# EAGLE board keeboartouch (EAGLE 9.6.2)
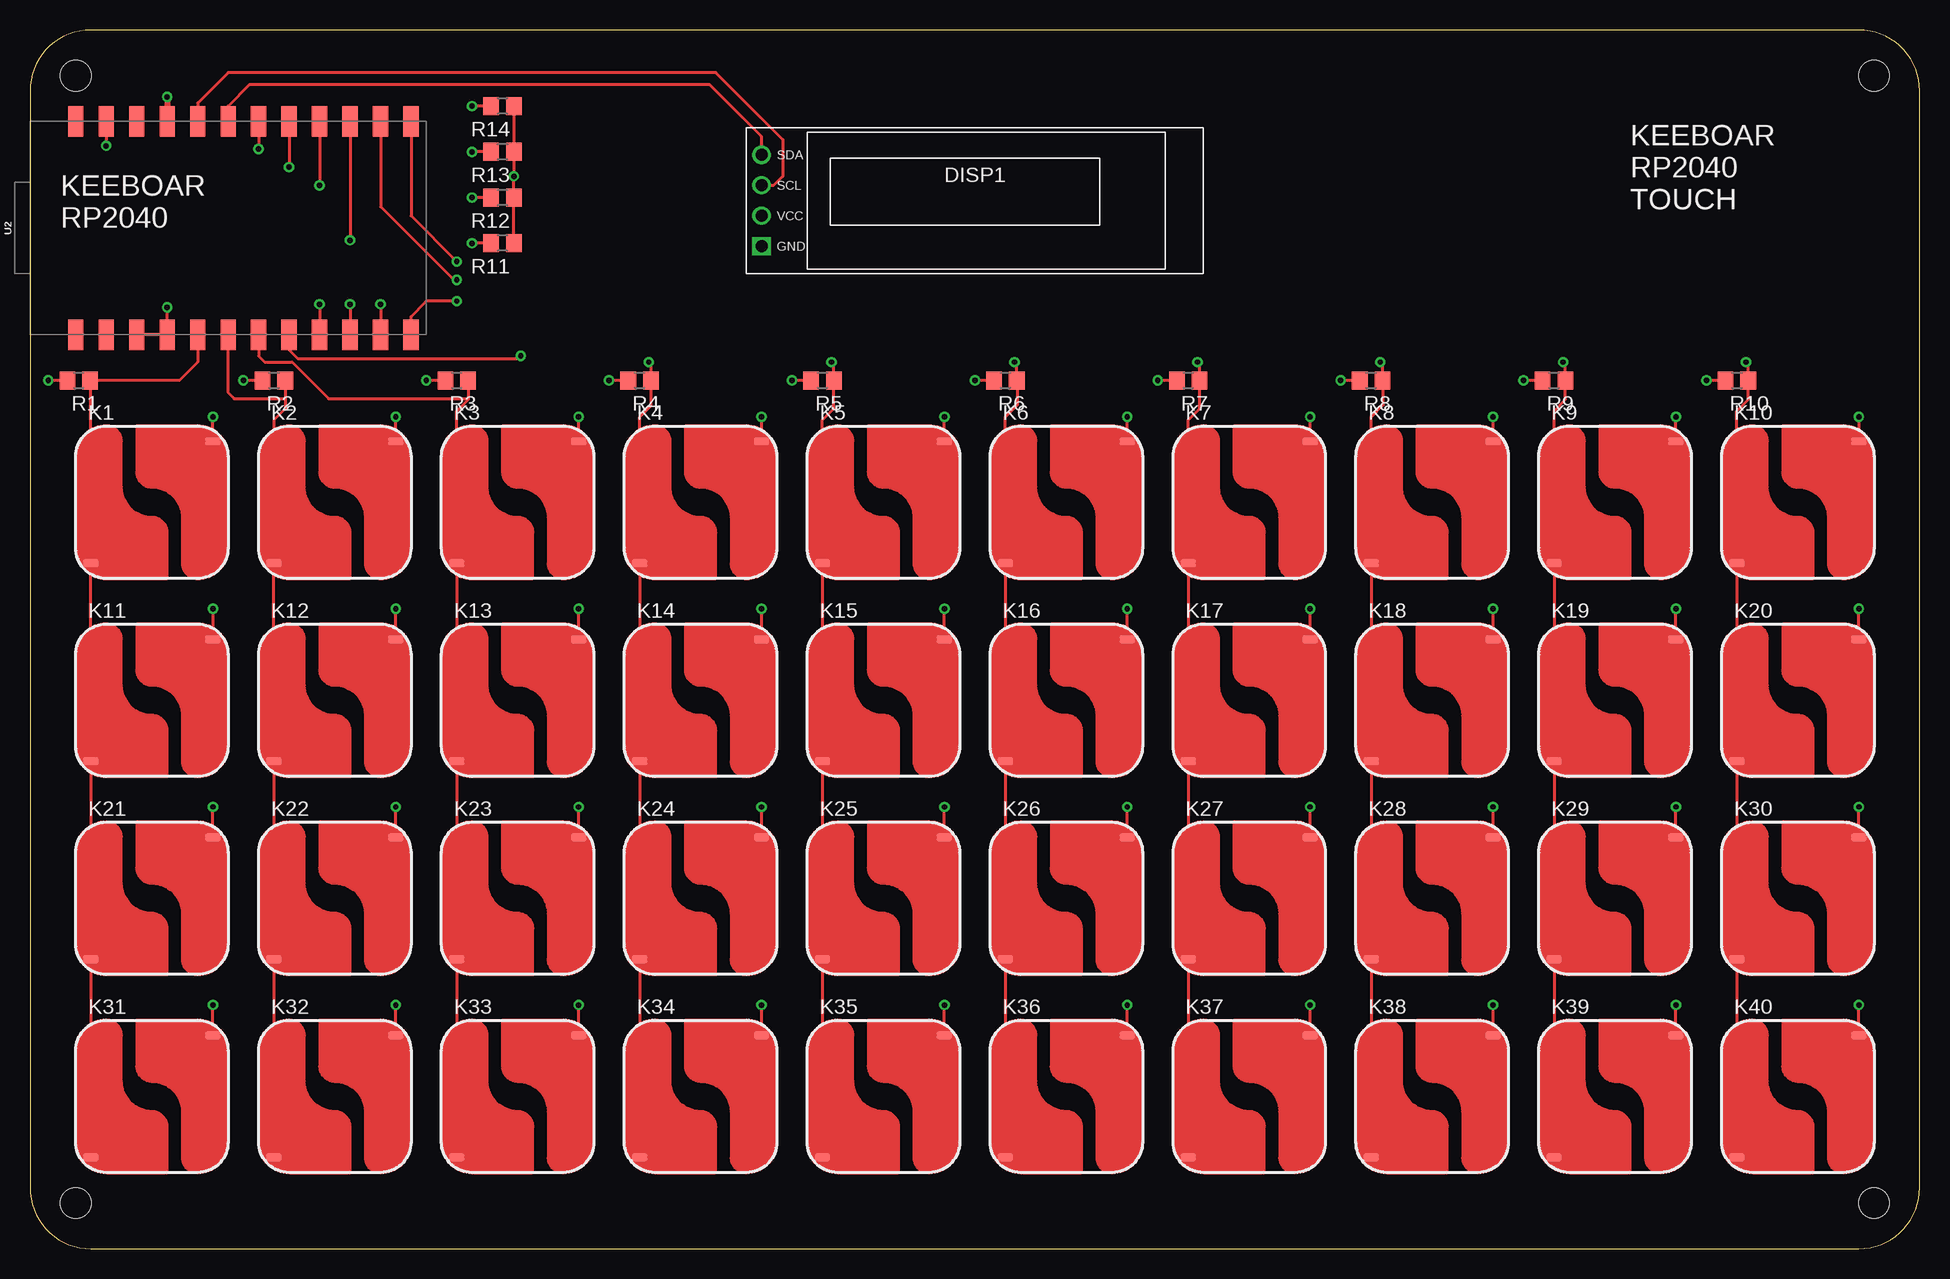
[diagram p0: board, top side]
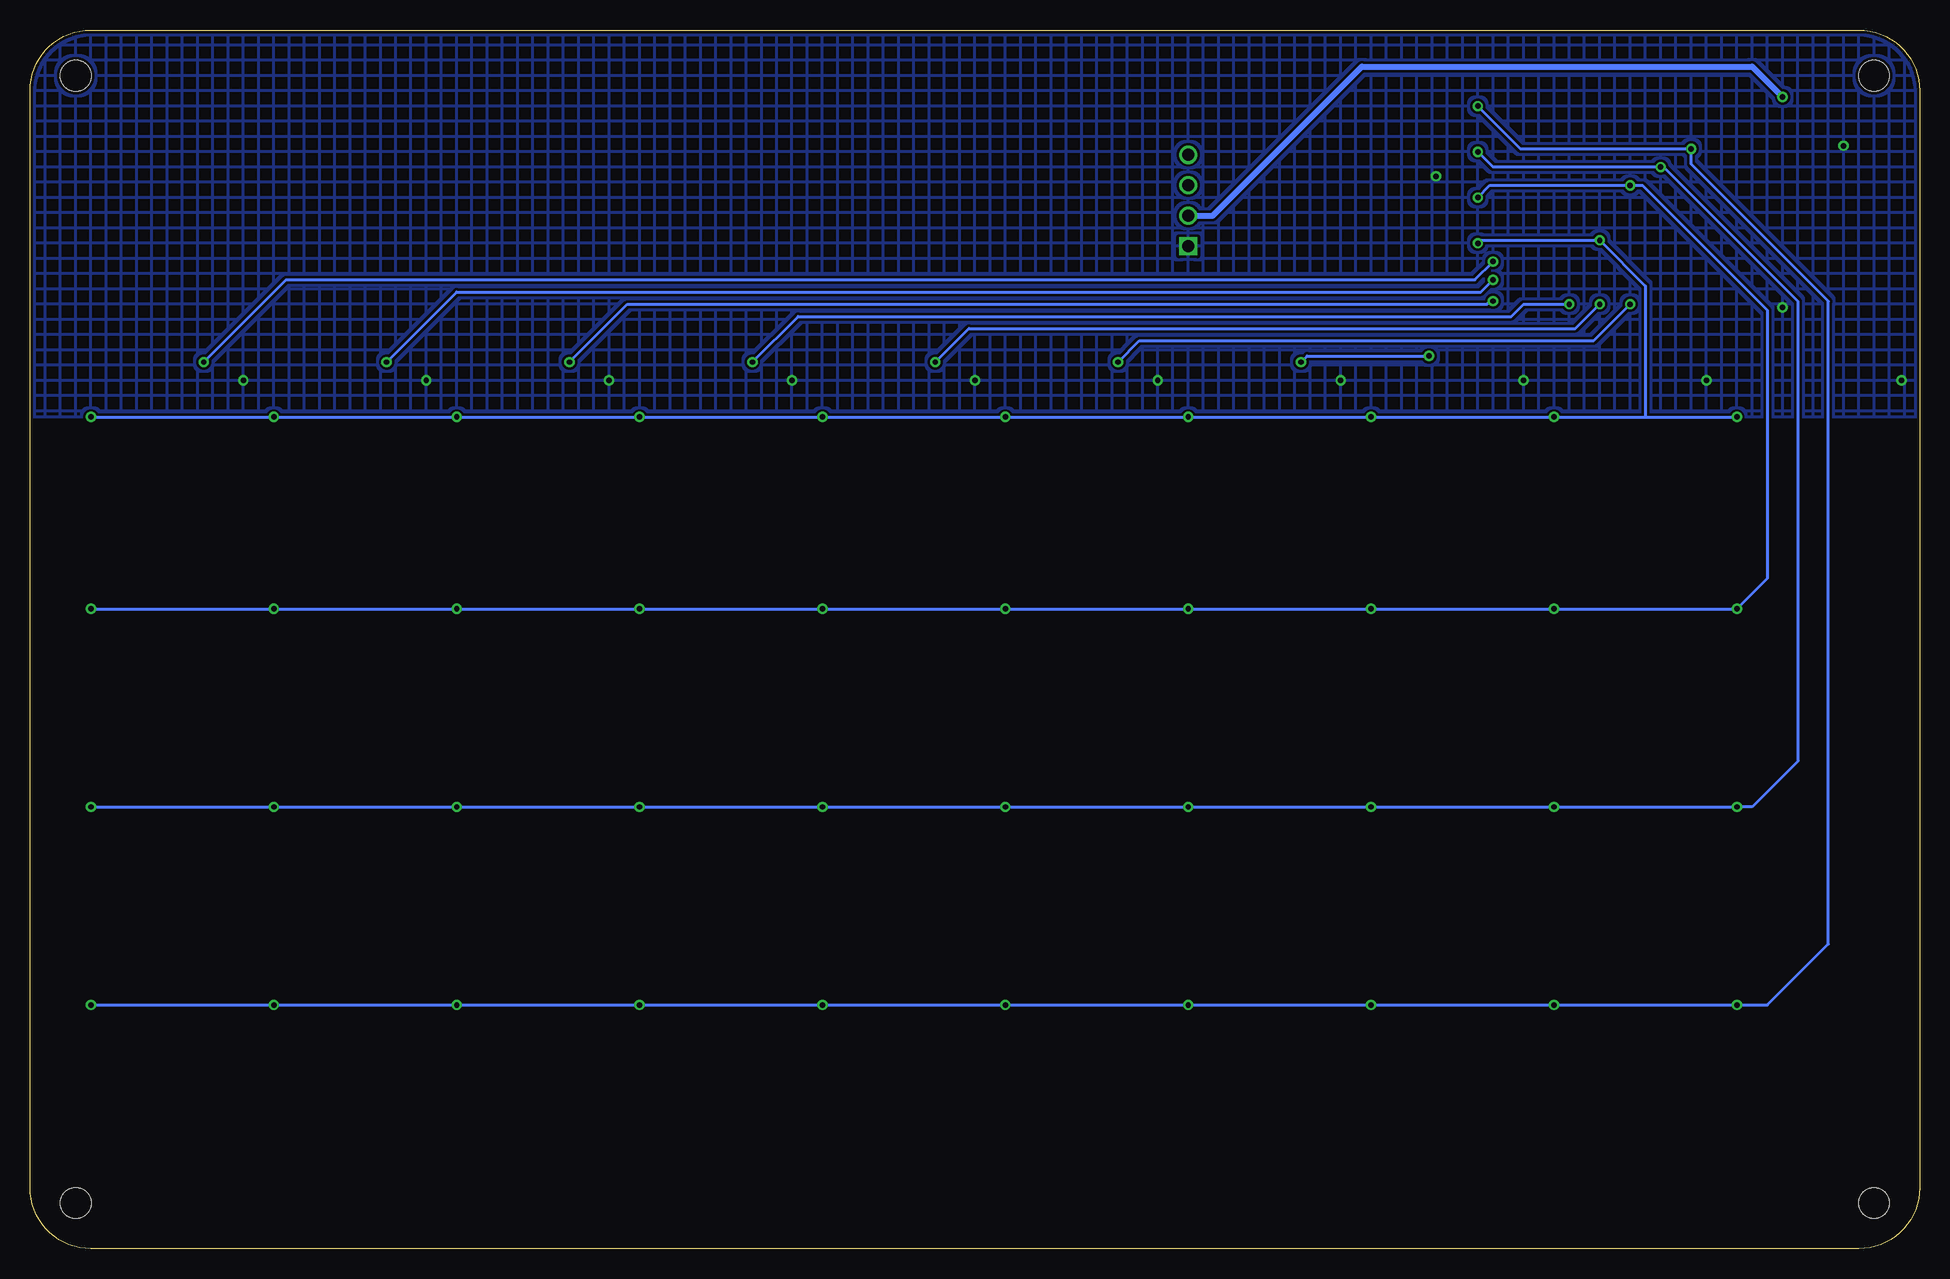
[diagram p1: board, bottom side, seen from below]

Size 157.48 x 101.6 mm. Coordinates in mm from the lower left corner, seen from the top.
Outline: 5.08,0 152.4,0 arc90 157.48,5.08 157.48,96.52 arc90 152.4,101.6 5.08,101.6 arc90 0,96.52 0,5.08 arc90 5.08,0
Copper layers (1*16): Top 0.035mm / dielectric 1.5mm / Bottom 0.035mm
Design rules "adafruit-rules-20180530": minimum track width 8mil, minimum drill 16mil, track to track 8mil, track to pad 8mil, pad to pad 8mil, via to via 8mil, smd to smd 8mil, copper to edge 10mil, drill to drill 8mil, minimum pad ring 10mil, minimum via ring 8mil, stop-mask expansion 4mil, vias tented up to drill 20mil, thermal gap 10mil
Holes 2.54 mm at 3.81,97.79 153.67,97.79 153.67,3.81 3.81,3.81

## Footprints (pad centres in the part's own frame; a part is rotated, then mirrored left to right if it is on the bottom)
DISPLAY-OLED-128X32 = drill 1 square: 1 -17.78,-3.81 | drill 1: 2 -17.78,-1.27; 3 -17.78,1.27; 4 -17.78,3.81
TOUCHPAD_KEY_0.5IN = smd 1.27 x 0.635: T1 -5.08,-5.08; T2 5.08,5.08
R0805 = smd 1.3 x 1.5: 1 -0.95,0; 2 0.95,0
PRO_MICRO_SMD = smd 2.54 x 1.27: 1 -8.89,12.7; 2 -8.89,10.16; 3 -8.89,7.62; 4 -8.89,5.08; 5 -8.89,2.54; 6 -8.89,0; 7 -8.89,-2.54; 8 -8.89,-5.08; 9 -8.89,-7.62; 10 -8.89,-10.16; 11 -8.89,-12.7; 12 -8.89,-15.24; 13 8.89,-15.24; 14 8.89,-12.7; 15 8.89,-10.16; 16 8.89,-7.62; 17 8.89,-5.08; 18 8.89,-2.54; 19 8.89,0; 20 8.89,2.54; 21 8.89,5.08; 22 8.89,7.62; 23 8.89,10.16; 24 8.89,12.7

## Placement (x,y rotation side)
DISP1  DISPLAY-OLED-128X32  [DISPLAY-OLED-128X32]  78.74,87.38 0 top
K1  TOUCHKEY  [TOUCHPAD_KEY_0.5IN]  10.16,62.23 0 top
K2  TOUCHKEY  [TOUCHPAD_KEY_0.5IN]  25.4,62.23 0 top
K3  TOUCHKEY  [TOUCHPAD_KEY_0.5IN]  40.64,62.23 0 top
K4  TOUCHKEY  [TOUCHPAD_KEY_0.5IN]  55.88,62.23 0 top
K5  TOUCHKEY  [TOUCHPAD_KEY_0.5IN]  71.12,62.23 0 top
K6  TOUCHKEY  [TOUCHPAD_KEY_0.5IN]  86.36,62.23 0 top
K7  TOUCHKEY  [TOUCHPAD_KEY_0.5IN]  101.6,62.23 0 top
K8  TOUCHKEY  [TOUCHPAD_KEY_0.5IN]  116.84,62.23 0 top
K9  TOUCHKEY  [TOUCHPAD_KEY_0.5IN]  132.08,62.23 0 top
K10  TOUCHKEY  [TOUCHPAD_KEY_0.5IN]  147.32,62.23 0 top
K11  TOUCHKEY  [TOUCHPAD_KEY_0.5IN]  10.16,45.72 0 top
K12  TOUCHKEY  [TOUCHPAD_KEY_0.5IN]  25.4,45.72 0 top
K13  TOUCHKEY  [TOUCHPAD_KEY_0.5IN]  40.64,45.72 0 top
K14  TOUCHKEY  [TOUCHPAD_KEY_0.5IN]  55.88,45.72 0 top
K15  TOUCHKEY  [TOUCHPAD_KEY_0.5IN]  71.12,45.72 0 top
K16  TOUCHKEY  [TOUCHPAD_KEY_0.5IN]  86.36,45.72 0 top
K17  TOUCHKEY  [TOUCHPAD_KEY_0.5IN]  101.6,45.72 0 top
K18  TOUCHKEY  [TOUCHPAD_KEY_0.5IN]  116.84,45.72 0 top
K19  TOUCHKEY  [TOUCHPAD_KEY_0.5IN]  132.08,45.72 0 top
K20  TOUCHKEY  [TOUCHPAD_KEY_0.5IN]  147.32,45.72 0 top
K21  TOUCHKEY  [TOUCHPAD_KEY_0.5IN]  10.16,29.21 0 top
K22  TOUCHKEY  [TOUCHPAD_KEY_0.5IN]  25.4,29.21 0 top
K23  TOUCHKEY  [TOUCHPAD_KEY_0.5IN]  40.64,29.21 0 top
K24  TOUCHKEY  [TOUCHPAD_KEY_0.5IN]  55.88,29.21 0 top
K25  TOUCHKEY  [TOUCHPAD_KEY_0.5IN]  71.12,29.21 0 top
K26  TOUCHKEY  [TOUCHPAD_KEY_0.5IN]  86.36,29.21 0 top
K27  TOUCHKEY  [TOUCHPAD_KEY_0.5IN]  101.6,29.21 0 top
K28  TOUCHKEY  [TOUCHPAD_KEY_0.5IN]  116.84,29.21 0 top
K29  TOUCHKEY  [TOUCHPAD_KEY_0.5IN]  132.08,29.21 0 top
K30  TOUCHKEY  [TOUCHPAD_KEY_0.5IN]  147.32,29.21 0 top
K31  TOUCHKEY  [TOUCHPAD_KEY_0.5IN]  10.16,12.7 0 top
K32  TOUCHKEY  [TOUCHPAD_KEY_0.5IN]  25.4,12.7 0 top
K33  TOUCHKEY  [TOUCHPAD_KEY_0.5IN]  40.64,12.7 0 top
K34  TOUCHKEY  [TOUCHPAD_KEY_0.5IN]  55.88,12.7 0 top
K35  TOUCHKEY  [TOUCHPAD_KEY_0.5IN]  71.12,12.7 0 top
K36  TOUCHKEY  [TOUCHPAD_KEY_0.5IN]  86.36,12.7 0 top
K37  TOUCHKEY  [TOUCHPAD_KEY_0.5IN]  101.6,12.7 0 top
K38  TOUCHKEY  [TOUCHPAD_KEY_0.5IN]  116.84,12.7 0 top
K39  TOUCHKEY  [TOUCHPAD_KEY_0.5IN]  132.08,12.7 0 top
K40  TOUCHKEY  [TOUCHPAD_KEY_0.5IN]  147.32,12.7 0 top
R1  1M  [R0805]  4.06,72.39 0 top
R2  1M  [R0805]  20.32,72.39 0 top
R3  1M  [R0805]  35.56,72.39 0 top
R4  1M  [R0805]  50.8,72.39 0 top
R5  1M  [R0805]  66.04,72.39 0 top
R6  1M  [R0805]  81.28,72.39 0 top
R7  1M  [R0805]  96.52,72.39 0 top
R8  1M  [R0805]  111.76,72.39 0 top
R9  1M  [R0805]  127,72.39 0 top
R10  1M  [R0805]  142.24,72.39 0 top
R11  1M  [R0805]  39.37,83.82 180 top
R12  1M  [R0805]  39.37,87.63 180 top
R13  1M  [R0805]  39.37,91.44 180 top
R14  1M  [R0805]  39.37,95.25 180 top
U2  PRO_MICROSMD  [PRO_MICRO_SMD]  16.51,85.09 90 top

## Library data of the parts
DISP1 = diy-modules
K1-K40 = todstuff
R1-R14 = rcl; SPICEPREFIX: R
U2 = pro-micro-todbot

## Nets
+3V3: DISP1.2 U2.21
+5V: U2.24
COL1: K1.T1 K11.T1 K21.T1 K31.T1 R1.2 U2.5
COL2: K2.T1 K12.T1 K22.T1 K32.T1 R2.2 U2.6
COL3: K3.T1 K13.T1 K23.T1 K33.T1 R3.2 U2.7
COL4: K4.T1 K14.T1 K24.T1 K34.T1 R4.2 U2.8
COL5: K5.T1 K15.T1 K25.T1 K35.T1 R5.2 U2.9
COL6: K6.T1 K16.T1 K26.T1 K36.T1 R6.2 U2.10
COL7: K7.T1 K17.T1 K27.T1 K37.T1 R7.2 U2.11
COL8: K8.T1 K18.T1 K28.T1 K38.T1 R8.2 U2.12
COL9: K9.T1 K19.T1 K29.T1 K39.T1 R9.2 U2.14
COL10: K10.T1 K20.T1 K30.T1 K40.T1 R10.2 U2.13
GND: DISP1.1 R1.1 R2.1 R3.1 R4.1 R5.1 R6.1 R7.1 R8.1 R9.1 R10.1 R11.1 R12.1 R13.1 R14.1 U2.3 U2.4 U2.23
MIDIOUT: U2.1
PWM_AUDIO: U2.2
ROW1: K1.T2 K2.T2 K3.T2 K4.T2 K5.T2 K6.T2 K7.T2 K8.T2 K9.T2 K10.T2 R11.2 U2.15
ROW2: K11.T2 K12.T2 K13.T2 K14.T2 K15.T2 K16.T2 K17.T2 K18.T2 K19.T2 K20.T2 R12.2 U2.16
ROW3: K21.T2 K22.T2 K23.T2 K24.T2 K25.T2 K26.T2 K27.T2 K28.T2 K29.T2 K30.T2 R13.2 U2.17
ROW4: K31.T2 K32.T2 K33.T2 K34.T2 K35.T2 K36.T2 K37.T2 K38.T2 K39.T2 K40.T2 R14.2 U2.18
SCL: DISP1.3 U2.20
SDA: DISP1.4 U2.19

## Tracks (layer width: path | path; a pad name or v marks a point on that pad's centre or on a via)
+3V3  (via drill 0.45)
  Top 0.508: v11.43,96.01 U2.21
  Bottom 0.508: DISP1.2 58.93,86.11 46.48,98.55 13.97,98.55 v11.43,96.01
COL1
  Top 0.254: K31.T1 K21.T1 K11.T1 K1.T1 5.08,72.32 R1.2 12.45,72.39 13.97,73.91 U2.5
COL2
  Top 0.254: K32.T1 K22.T1 K12.T1 K2.T1 20.32,69.09 21.27,70.04 21.27,70.87 | R2.2 21.27,70.87 | U2.6 16.51,71.37 17.02,70.87 21.27,70.87
COL3
  Top 0.254: K33.T1 K23.T1 K13.T1 K3.T1 35.56,69.85 36.51,70.8 36.51,70.87 | R3.2 36.51,70.87 | U2.7 19.05,74.42 19.56,73.91 21.84,73.91 24.89,70.87 36.51,70.87
COL4  (via drill 0.45)
  Top 0.254: K34.T1 K24.T1 K14.T1 K4.T1 50.8,69.34 51.75,70.29 R4.2 51.75,73.73 v51.56,73.91 | U2.8 21.59,74.93 22.35,74.17 40.64,74.17 v40.89,74.42
  Bottom 0.254: v51.56,73.91 51.05,74.42 v40.89,74.42
COL5  (via drill 0.45)
  Top 0.254: K35.T1 K25.T1 K15.T1 K5.T1 66.04,69.09 66.99,70.04 R5.2 66.99,73.73 v66.8,73.91 | v24.13,78.74 U2.9
  Bottom 0.254: v66.8,73.91 65.02,75.69 27.18,75.69 v24.13,78.74
COL6  (via drill 0.45)
  Top 0.254: K36.T1 K26.T1 K16.T1 K6.T1 81.28,69.34 82.3,70.36 82.3,72.32 R6.2 82.23,73.73 v82.04,73.91 | v26.67,78.74 U2.10
  Bottom 0.254: v82.04,73.91 79.25,76.71 28.7,76.71 v26.67,78.74
COL7  (via drill 0.45)
  Top 0.254: K37.T1 K27.T1 K17.T1 K7.T1 96.52,69.09 97.47,70.04 R7.2 97.47,73.73 v97.28,73.91 | v29.21,78.74 U2.11
  Bottom 0.254: v97.28,73.91 93.47,77.72 34.04,77.72 33.02,78.74 v29.21,78.74
COL8  (via drill 0.45)
  Top 0.254: K38.T1 K28.T1 K18.T1 K8.T1 111.76,69.34 112.78,70.36 112.78,72.32 R8.2 112.71,73.73 v112.52,73.91 | v35.56,78.99 33.02,78.99 31.75,77.72 U2.12
  Bottom 0.254: v35.56,78.99 35.81,78.99 36.07,78.74 107.7,78.74 v112.52,73.91
COL9  (via drill 0.45)
  Top 0.254: U2.14 29.21,86.87 35.31,80.77 v35.56,80.77 | K39.T1 K29.T1 K19.T1 K9.T1 127,69.85 127.95,70.8 R9.2 127.95,73.73 v127.76,73.91
  Bottom 0.254: v35.56,80.77 36.58,79.76 121.92,79.76 v127.76,73.91
COL10  (via drill 0.45)
  Top 0.254: U2.13 31.75,86.11 v35.56,82.3 | K40.T1 K30.T1 K20.T1 K10.T1 142.24,69.85 143.19,70.8 R10.2 143.19,73.73 v143,73.91
  Bottom 0.254: v143,73.91 136.14,80.77 37.08,80.77 v35.56,82.3
GND  (via drill 0.45)
  Top 0.254: U2.3 U2.4 v11.43,78.49 | U2.23 v6.35,91.95 | R1.1 v1.52,72.39 | R2.1 v17.78,72.39 | R3.1 v33.02,72.39 | R10.1 v139.7,72.39 | R9.1 v124.46,72.39 | R8.1 v109.22,72.39 | R7.1 v93.98,72.39 | R6.1 v78.74,72.39 | R5.1 v63.5,72.39 | R4.1 v48.26,72.39 | R11.1 R12.1 v40.32,89.41 R13.1 R14.1
  pour Bottom (hatched): -0.64,69.34 157.48,69.34 157.48,102.76 -0.1,102.76
ROW1  (via drill 0.45)
  Top 0.254: v152.4,69.34 K10.T2 | K9.T2 v137.16,69.34 | K8.T2 v121.92,69.34 | K7.T2 v106.68,69.34 | K6.T2 v91.44,69.34 | K5.T2 v76.2,69.34 | K4.T2 v60.96,69.34 | K3.T2 v45.72,69.34 | K2.T2 v30.48,69.34 | K1.T2 v15.24,69.34 | R11.2 v36.83,83.82 | U2.15 v26.67,84.07
  Bottom 0.254: v152.4,69.34 v137.16,69.34 v121.92,69.34 v106.68,69.34 v91.44,69.34 v76.2,69.34 v60.96,69.34 v45.72,69.34 v30.48,69.34 22.86,69.34 | 22.86,69.34 v15.24,69.34 | v36.83,83.82 36.58,84.07 v26.67,84.07 22.86,80.26 22.86,69.34
ROW2  (via drill 0.45)
  Top 0.254: K20.T2 v152.4,53.34 | v15.24,53.34 K11.T2 | K12.T2 v30.48,53.34 | K13.T2 v45.72,53.34 | K14.T2 v60.96,53.34 | K15.T2 v76.2,53.34 | K16.T2 v91.44,53.34 | K17.T2 v106.68,53.34 | K18.T2 v121.92,53.34 | K19.T2 v137.16,53.34 | R12.2 v36.83,87.63 | U2.16 v24.13,88.65
  Bottom 0.254: v152.4,53.34 v137.16,53.34 v121.92,53.34 v106.68,53.34 v91.44,53.34 v76.2,53.34 v60.96,53.34 v45.72,53.34 v30.48,53.34 v15.24,53.34 12.7,55.88 12.7,78.23 23.11,88.65 v24.13,88.65 35.81,88.65 v36.83,87.63
ROW3  (via drill 0.45)
  Top 0.254: K30.T2 v152.4,36.83 | K21.T2 v15.24,36.83 | K22.T2 v30.48,36.83 | K23.T2 v45.72,36.83 | K24.T2 v60.96,36.83 | K25.T2 v76.2,36.83 | K26.T2 v91.44,36.83 | K27.T2 v106.68,36.83 | K28.T2 v121.92,36.83 | K29.T2 v137.16,36.83 | R13.2 v36.83,91.44 | U2.17 v21.59,90.17
  Bottom 0.254: v152.4,36.83 v137.16,36.83 v121.92,36.83 v106.68,36.83 v91.44,36.83 v76.2,36.83 v60.96,36.83 v45.72,36.83 v30.48,36.83 v15.24,36.83 13.97,36.83 10.16,40.64 10.16,78.99 21.34,90.17 v21.59,90.17 35.56,90.17 v36.83,91.44
ROW4  (via drill 0.45)
  Top 0.254: K40.T2 v152.4,20.32 | K31.T2 v15.24,20.32 | K32.T2 v30.48,20.32 | K33.T2 v45.72,20.32 | K34.T2 v60.96,20.32 | K35.T2 v76.2,20.32 | K36.T2 v91.44,20.32 | K37.T2 v106.68,20.32 | K38.T2 v121.92,20.32 | K39.T2 v137.16,20.32 | R14.2 v36.83,95.25 | U2.18 v19.05,91.69
  Bottom 0.254: v152.4,20.32 v137.16,20.32 v121.92,20.32 v106.68,20.32 v91.44,20.32 v76.2,20.32 v60.96,20.32 v45.72,20.32 v30.48,20.32 v15.24,20.32 12.7,20.32 7.62,25.4 7.62,78.99 19.05,90.42 v19.05,91.69 33.27,91.69 v36.83,95.25
SCL
  Top 0.254: DISP1.3 61.98,88.65 62.74,89.41 62.74,92.46 57.15,98.04 16.51,98.04 13.97,95.5 U2.20
SDA
  Top 0.254: U2.19 16.51,95.25 18.29,97.03 56.64,97.03 60.96,92.71 DISP1.4

## Text on the board
tPlace: KEEBOAR / RP2040 / TOUCH | KEEBOAR / RP2040